# EAGLE board CT_schematic (EAGLE 7.6.0)

Size 100 x 80 mm. Coordinates in mm from the lower left corner, seen from the top.
Outline: 0,0 100,0 100,80 0,80 0,0
Copper layers (1*16): Top 0.035mm / dielectric 1.5mm / Bottom 0.035mm
Design rules "default": minimum track width 10mil, minimum drill 24mil, track to track 8mil, track to pad 8mil, pad to pad 8mil, via to via 8mil, smd to smd 8mil, copper to edge 40mil, drill to drill 8mil, minimum pad ring 10mil, minimum via ring 8mil, stop-mask expansion 4mil, vias tented up to drill 0mil, thermal gap 10mil

## Footprints (pad centres in the part's own frame; a part is rotated, then mirrored left to right if it is on the bottom)
C0603 = smd 0.8 x 0.8: 1 -0.762,0; 2 0.762,0
C0402 = smd 0.5 x 0.5: 1 -0.508,0; 2 0.508,0
C0805 = smd 1.2 x 1.3: 1 -1.016,0; 2 1.016,0
C1210 = smd 1.2 x 2.5: 1 -1.524,0; 2 1.524,0
R0603 = smd 0.8 x 0.8: 1 -0.762,0; 2 0.762,0
EXV-9H = smd 3.505 x 1.676: 1 -2.857,0; 2 2.857,0
L0603 = smd 0.8 x 0.8: 1 -0.762,0; 2 0.762,0
IND25X25CZ = smd 2.489 x 3.429: 1 -2.718,0; 2 2.718,0
PJ-037B_PACKAGE = drill 3.7 square: 1 12,0 | drill 3.2 square: 2 6,0
LQFP100 = smd 0.3 x 1.2: 1 -6,-7.75; 2 -5.5,-7.75; 3 -5,-7.75; 4 -4.5,-7.75; 5 -4,-7.75; 6 -3.5,-7.75; 7 -3,-7.75; 8 -2.5,-7.75; 9 -2,-7.75; 10 -1.5,-7.75; 11 -1,-7.75; 12 -0.5,-7.75; 13 0,-7.75; 14 0.5,-7.75; 15 1,-7.75; 16 1.5,-7.75; 17 2,-7.75; 18 2.5,-7.75; 19 3,-7.75; 20 3.5,-7.75; 21 4,-7.75; 22 4.5,-7.75; 23 5,-7.75; 24 5.5,-7.75; 25 6,-7.75; 51 6,7.75; 52 5.5,7.75; 53 5,7.75; 54 4.5,7.75; 55 4,7.75; 56 3.5,7.75; 57 3,7.75; 58 2.5,7.75; 59 2,7.75; 60 1.5,7.75; 61 1,7.75; 62 0.5,7.75; 63 0,7.75; 64 -0.5,7.75; 65 -1,7.75; 66 -1.5,7.75; 67 -2,7.75; 68 -2.5,7.75; 69 -3,7.75; 70 -3.5,7.75; 71 -4,7.75; 72 -4.5,7.75; 73 -5,7.75; 74 -5.5,7.75; 75 -6,7.75 | smd 1.2 x 0.3: 26 7.75,-6; 27 7.75,-5.5; 28 7.75,-5; 29 7.75,-4.5; 30 7.75,-4; 31 7.75,-3.5; 32 7.75,-3; 33 7.75,-2.5; 34 7.75,-2; 35 7.75,-1.5; 36 7.75,-1; 37 7.75,-0.5; 38 7.75,0; 39 7.75,0.5; 40 7.75,1; 41 7.75,1.5; 42 7.75,2; 43 7.75,2.5; 44 7.75,3; 45 7.75,3.5; 46 7.75,4; 47 7.75,4.5; 48 7.75,5; 49 7.75,5.5; 50 7.75,6; 76 -7.75,6; 77 -7.75,5.5; 78 -7.75,5; 79 -7.75,4.5; 80 -7.75,4; 81 -7.75,3.5; 82 -7.75,3; 83 -7.75,2.5; 84 -7.75,2; 85 -7.75,1.5; 86 -7.75,1; 87 -7.75,0.5; 88 -7.75,0; 89 -7.75,-0.5; 90 -7.75,-1; 91 -7.75,-1.5; 92 -7.75,-2; 93 -7.75,-2.5; 94 -7.75,-3; 95 -7.75,-3.5; 96 -7.75,-4; 97 -7.75,-4.5; 98 -7.75,-5; 99 -7.75,-5.5; 100 -7.75,-6
SOIC-8 = smd 1.6 x 0.6: 1 -2.7,1.905 | smd 1.55 x 0.6: 2 -2.7,0.635; 3 -2.7,-0.635; 4 -2.7,-1.905; 5 2.7,-1.905; 6 2.7,-0.635; 7 2.7,0.635; 8 2.7,1.905
M41T65_QFN-16 = smd 0.775 x 0.305: 1 -1.387,0.75; 2 -1.387,0.25; 3 -1.387,-0.25; 4 -1.387,-0.75; 9 1.387,-0.75; 10 1.387,-0.25; 11 1.387,0.25; 12 1.387,0.75 | smd 0.305 x 0.775: 5 -0.75,-1.387; 6 -0.25,-1.387; 7 0.25,-1.387; 8 0.75,-1.387; 13 0.75,1.387; 14 0.25,1.387; 15 -0.25,1.387; 16 -0.75,1.387 | smd 1.6 x 1.6: 17 0,0
SSOP-28 = smd 1.5 x 0.4: 1 -3.625,4.225; 2 -3.625,3.575; 3 -3.625,2.925; 4 -3.625,2.275; 5 -3.625,1.625; 6 -3.625,0.975; 7 -3.625,0.325; 8 -3.625,-0.325; 9 -3.625,-0.975; 10 -3.625,-1.625; 11 -3.625,-2.275; 12 -3.625,-2.925; 13 -3.625,-3.575; 14 -3.625,-4.225; 15 3.625,-4.225; 16 3.625,-3.575; 17 3.625,-2.925; 18 3.625,-2.275; 19 3.625,-1.625; 20 3.625,-0.975; 21 3.625,-0.325; 22 3.625,0.325; 23 3.625,0.975; 24 3.625,1.625; 25 3.625,2.275; 26 3.625,2.925; 27 3.625,3.575; 28 3.625,4.225
HTSS-105-01-G-D = drill 1 pad 1.8 square: 1 0,0 | drill 1 pad 1.8: 2 0,2.54; 3 2.54,0; 4 2.54,2.54; 5 5.08,0; 6 5.08,2.54; 7 7.62,0; 8 7.62,2.54; 9 10.16,0; 10 10.16,2.54
ABS07-32.768KHZ-7-T = smd 1.1 x 2.4: 1 -2.5,0; 2 0,0
ASEK = smd 1.4 x 1: 1 -1.1,-0.8; 2 1.1,-0.8; 3 1.1,0.8; 4 -1.1,0.8
ASFL1 = smd 1.7 x 1.5: 1 -1.27,-1.1; 2 1.27,-1.1; 3 1.27,1.1; 4 -1.27,1.1
IR3899MTR1PBF = smd 0.25 x 0.75: 1 0,0; 2 0.5,0; 3 1,0; 4 1.5,0; 5 2,0; 6 2.5,0; 7 3,0 | smd 0.75 x 0.25: 8 3.425,0.78; 9 3.425,1.28; 10 3.425,1.78; 14 -0.425,1.78; 15 -0.425,1.28; 16 -0.425,0.78 | smd 0.3 x 1.95: 11 3.22,3.63 | smd 1.62 x 2.42: 12 1.786,3.8 | smd 1 x 1.95: 13 0.117,3.63 | smd 2.19 x 1.25: 17 1.51,1.26
SON-6 = smd 0.55 x 0.3: 1 -0.355,0.5 | smd 0.52 x 0.3: 2 -0.37,0; 3 -0.37,-0.5; 4 0.37,-0.5; 5 0.37,0; 6 0.37,0.5
SW_4-1437565-2 = smd 1.4 x 2.1: 1 -2.23,4.55; 2 -2.23,-4.55; 3 2.23,4.55; 4 2.23,-4.55
LGM67K-G1J2-24-Z = smd 0.8 x 1.4: A -2,0; C 0,0
NC7SZ125M5X = smd 1.3 x 0.7: 1 -1.3,0.95; 2 -1.3,0; 3 -1.3,-0.95; 4 1.3,-0.95; 5 1.3,0.95
DUMMY_PACKAGE_141 = drill 0.3: 1 0,-1; 2 1.5,-1; 3 3,-1

## Placement (x,y rotation side)
C1  1e-07  [C0603]  -52.07,63.5 0 top  (outside the outline)
C2  1e-07  [C0603]  -55.88,63.5 0 top  (outside the outline)
C3  1e-07  [C0603]  -59.69,63.5 0 top  (outside the outline)
C4  1e-07  [C0603]  -63.5,63.5 0 top  (outside the outline)
C5  1e-07  [C0603]  -67.31,63.5 0 top  (outside the outline)
C6  4.7e-06  [C0603]  -44.45,63.5 0 top  (outside the outline)
C7  1e-07  [C0603]  -15.24,68.58 0 top  (outside the outline)
C8  1e-08  [C0603]  -19.05,68.58 0 top  (outside the outline)
C9  1e-06  [C0603]  -22.86,68.58 0 top  (outside the outline)
C10  1e-08  [C0402]  -57.15,68.58 0 top  (outside the outline)
C11  4.7e-06  [C0805]  -40.64,50.8 0 top  (outside the outline)
C12  1e-07  [C0402]  -60.96,68.58 0 top  (outside the outline)
C13  1e-07  [C0402]  -64.77,68.58 0 top  (outside the outline)
C14  1e-07  [C0402]  -68.58,68.58 0 top  (outside the outline)
C15  1e-07  [C0402]  -15.24,73.66 0 top  (outside the outline)
C16  1e-07  [C0402]  -19.05,73.66 0 top  (outside the outline)
C17  1e-08  [C0402]  -22.86,73.66 0 top  (outside the outline)
C18  1e-08  [C0402]  -26.67,73.66 0 top  (outside the outline)
C19  0.0001  [C1210]  -29.21,52.07 0 top  (outside the outline)
C20  2.2e-06  [C0603]  -48.26,63.5 0 top  (outside the outline)
C21  1e-07  [C0402]  -30.48,73.66 0 top  (outside the outline)
C22  1e-07  [C0402]  -34.29,73.66 0 top  (outside the outline)
C23  8.6971073877236e-09  [R0603]  -50.8,50.8 0 top  (outside the outline)
C24  2.9649229730876e-07  [R0603]  -60.96,50.8 0 top  (outside the outline)
C27  1e-07  [C0402]  -38.1,73.66 0 top  (outside the outline)
C28  0.0001  [EXV-9H]  -17.78,44.45 0 top  (outside the outline)
C29  0.0001  [EXV-9H]  -29.21,44.45 0 top  (outside the outline)
C30  1e-08  [C0402]  -41.91,73.66 0 top  (outside the outline)
F1  240.0  [L0603]  -26.67,68.58 0 top  (outside the outline)
I1  6.8e-07  [IND25X25CZ]  -39.37,44.45 0 top  (outside the outline)
J1  PJ-037B  [PJ-037B_PACKAGE]  -59.69,7.62 0 top  (outside the outline)
R2  1000.0  [R0603]  -30.48,68.58 0 top  (outside the outline)
R4  4700.0  [R0603]  -34.29,68.58 0 top  (outside the outline)
R5  2200.0  [R0603]  -38.1,68.58 0 top  (outside the outline)
R6  2200.0  [R0603]  -41.91,68.58 0 top  (outside the outline)
R7  10000.0  [R0603]  -54.61,58.42 0 top  (outside the outline)
R8  10000.0  [R0603]  -59.69,58.42 0 top  (outside the outline)
R9  10000.0  [R0603]  -64.77,58.42 0 top  (outside the outline)
R10  10000.0  [R0603]  -69.85,58.42 0 top  (outside the outline)
R11  10000.0  [R0603]  -15.24,63.5 0 top  (outside the outline)
R12  10000.0  [R0603]  -20.32,63.5 0 top  (outside the outline)
R13  100000.0  [R0603]  -39.37,58.42 0 top  (outside the outline)
R14  0.1  [R0603]  -45.72,68.58 0 top  (outside the outline)
R15  4030.2416170974  [R0603]  -68.58,50.8 0 top  (outside the outline)
R16  719.68600305311  [R0603]  -19.05,58.42 0 top  (outside the outline)
R17  58.613333333333  [R0603]  -26.67,58.42 0 top  (outside the outline)
R18  130.0  [R0603]  -49.53,68.58 0 top  (outside the outline)
R19  39000.0  [R0603]  -25.4,63.5 0 top  (outside the outline)
R20  49900.0  [R0603]  -30.48,63.5 0 top  (outside the outline)
R21  5147.5789473684  [R0603]  -34.29,58.42 0 top  (outside the outline)
R22  10000.0  [R0603]  -35.56,63.5 0 top  (outside the outline)
R23  10000.0  [R0603]  -40.64,63.5 0 top  (outside the outline)
R24  9100.0  [R0603]  -53.34,68.58 0 top  (outside the outline)
R25  680000.0  [R0603]  -44.45,58.42 0 top  (outside the outline)
R26  120000.0  [R0603]  -49.53,58.42 0 top  (outside the outline)
U1  STM32L152VCT6  [LQFP100]  -24.13,8.89 0 top  (outside the outline)
U2  AT25080B-SSHL-T  [SOIC-8]  -24.13,35.56 0 top  (outside the outline)
U3  M41T65Q6F  [M41T65_QFN-16]  -46.99,73.66 0 top  (outside the outline)
U4  ST3241EBPR  [SSOP-28]  -39.37,7.62 0 top  (outside the outline)
U5  HTSS-105-01-G-D  [HTSS-105-01-G-D]  -62.23,21.59 0 top  (outside the outline)
U6  ABS07-32.768KHZ-7-T  [ABS07-32.768KHZ-7-T]  -58.42,44.45 0 top  (outside the outline)
U7  ASEK-32.768KHz-ECST  [ASEK]  -62.23,34.29 0 top  (outside the outline)
U8  ASFL1-25MHZ-NCS  [ASFL1]  -41.91,34.29 0 top  (outside the outline)
U9  IR3899MTR1PBF  [IR3899MTR1PBF]  -44.45,20.32 0 top  (outside the outline)
U10  TPS3895ADRYR  [SON-6]  -58.42,72.39 0 top  (outside the outline)
U11  4-1437565-2  [SW_4-1437565-2]  -27.94,24.13 0 top  (outside the outline)
U12  Q65110A2395  [LGM67K-G1J2-24-Z]  -17.78,52.07 0 top  (outside the outline)
U13  nc7sz125m5x  [NC7SZ125M5X]  -34.29,50.8 0 top  (outside the outline)
U14  Dummy  [DUMMY_PACKAGE_141]  -55.88,73.66 0 top  (outside the outline)

## Library data of the parts
C1-C24 C27-C30 F1 I1 J1 R2 R4-R26 U1-U14 = circuit_tree

## Nets
CLK_CRYSTAL_U3_1: U3.1 U6.1
CLK_CRYSTAL_U3_2: U3.2 U6.2
CLK_U1_8: U1.8 U7.3
CLK_U1_12: U1.12 U8.3
GND: C1.2 C2.2 C3.2 C4.2 C5.2 C6.2 C7.2 C8.2 C9.2 C10.2 C11.2 C12.2 C15.2 C16.2 C17.2 C18.2 C20.2 C21.2 C22.2 C27.2 C28.2 C29.2 C30.2 J1.2 R2.2 R7.2 R14.1 R14.2 R16.2 R19.2 R21.2 R24.2 R26.2 U1.10 U1.19 U1.20 U1.27 U1.49 U1.74 U1.99 U2.4 U3.3 U3.5 U3.17 U4.23 U4.25 U5.9 U7.2 U8.2 U9.4 U9.11 U9.17 U10.2 U12.C U13.1 U13.3 U14.1
NET_U1_6: C7.1 U1.6
NET_U1_14: R4.1 U1.14 U13.4
NET_U1_22: C8.1 C9.1 F1.1 U1.21 U1.22
NET_U1_92: R5.1 U1.92 U3.10
NET_U1_93: R6.1 U1.93 U3.9
NET_U1_94: R7.1 U1.94
NET_U1_97: U12.A
NET_U1_98: U11.3 U11.4
NET_U2_3: R8.1 U2.3
NET_U2_7: R10.1 U2.7
NET_U3_4: R11.1 U3.4
NET_U3_11: R12.1 U3.11
NET_U4_1: C14.1 U4.1
NET_U4_2: C14.2 U4.2
NET_U4_3: C16.1 U4.3
NET_U4_22: R13.1 U4.22
NET_U4_24: C13.2 U4.24
NET_U4_27: C15.1 U4.27
NET_U4_28: C13.1 U4.28
NET_U5_3: U4.4 U5.3
NET_U5_4: U4.5 U5.4
NET_U5_5: U4.9 U5.5
NET_U5_6: U4.10 U5.6
NET_U9_1: C23.1 R15.1 R16.1 R17.1 R18.1 U9.1 U9.8
NET_U9_2: C22.1 U9.2
NET_U9_3: C23.2 C24.1 C24.2 U9.3
NET_U9_5: R19.1 U9.5
NET_U9_10: C20.1 U9.10
NET_U9_12: C19.1 I1.1 U9.12
NET_U9_13: U9.13
NET_U9_14: C19.2 U9.14
NET_U9_15: R20.1 R21.1 U9.15
NET_U9_ATNET_3: I1.2 R15.2
NET_U9_ATNET_4: C24.2 R17.2
NET_U9_ATNET_5: R18.2
NET_U10_1: R23.1 R24.1 U10.1
NET_U10_3: R25.2 R26.1 U10.3
NET_U10_4: R22.1 U10.4 U13.2
NET_U11_1: R2.1 U11.1 U11.2
PROC_PE2: U1.1 U14.2
PROC_PE3: U1.2 U14.3
PROC_SPI1_MISO: U1.31 U2.2
PROC_SPI1_MOSI: U1.32 U2.5
PROC_SPI1_NSS: R9.1 U1.29 U2.1
PROC_SPI1_SCK: U1.30 U2.6
PROC_USART1_CTS: U1.70 U4.13
PROC_USART1_RTS: U1.71 U4.18
PROC_USART1_RX: U1.69 U4.19
PROC_USART1_TX: U1.68 U4.14
VCC_S1_16V8: C21.1 C28.1 C29.1 J1.1 R20.2 U9.9
VCC_TIER1_3V3: C1.1 C2.1 C3.1 C4.1 C5.1 C6.1 C10.1 C11.1 C12.1 C17.1 C18.1 C27.1 C30.1 F1.2 I1.2 R4.2 R5.2 R6.2 R8.2 R9.2 R10.2 R11.2 R12.2 R13.2 R15.2 R22.2 R23.2 R25.1 U1.11 U1.28 U1.50 U1.75 U1.100 U2.8 U3.14 U4.26 U7.4 U8.4 U10.6 U13.5

## Tracks (layer width: path | path; a pad name or v marks a point on that pad's centre or on a via)
CLK_CRYSTAL_U3_1  (1 unrouted)
CLK_CRYSTAL_U3_2  (1 unrouted)
CLK_U1_8  (1 unrouted)
CLK_U1_12  (1 unrouted)
GND  (56 unrouted)
NET_U1_6  (1 unrouted)
NET_U1_14  (2 unrouted)
NET_U1_22  (4 unrouted)
NET_U1_92  (2 unrouted)
NET_U1_93  (2 unrouted)
NET_U1_94  (1 unrouted)
NET_U1_98  (1 unrouted)
NET_U2_3  (1 unrouted)
NET_U2_7  (1 unrouted)
NET_U3_4  (1 unrouted)
NET_U3_11  (1 unrouted)
NET_U4_1  (1 unrouted)
NET_U4_2  (1 unrouted)
NET_U4_3  (1 unrouted)
NET_U4_22  (1 unrouted)
NET_U4_24  (1 unrouted)
NET_U4_27  (1 unrouted)
NET_U4_28  (1 unrouted)
NET_U5_3  (1 unrouted)
NET_U5_4  (1 unrouted)
NET_U5_5  (1 unrouted)
NET_U5_6  (1 unrouted)
NET_U9_1  (6 unrouted)
NET_U9_2  (1 unrouted)
NET_U9_3  (3 unrouted)
NET_U9_5  (1 unrouted)
NET_U9_10  (1 unrouted)
NET_U9_12  (2 unrouted)
NET_U9_14  (1 unrouted)
NET_U9_15  (2 unrouted)
NET_U9_ATNET_3  (1 unrouted)
NET_U9_ATNET_4  (1 unrouted)
NET_U10_1  (2 unrouted)
NET_U10_3  (2 unrouted)
NET_U10_4  (2 unrouted)
NET_U11_1  (2 unrouted)
PROC_PE2  (1 unrouted)
PROC_PE3  (1 unrouted)
PROC_SPI1_MISO  (1 unrouted)
PROC_SPI1_MOSI  (1 unrouted)
PROC_SPI1_NSS  (2 unrouted)
PROC_SPI1_SCK  (1 unrouted)
PROC_USART1_CTS  (1 unrouted)
PROC_USART1_RTS  (1 unrouted)
PROC_USART1_RX  (1 unrouted)
PROC_USART1_TX  (1 unrouted)
VCC_S1_16V8  (5 unrouted)
VCC_TIER1_3V3  (39 unrouted)